# EAGLE board telemetry-r2 (EAGLE 7.7.0)
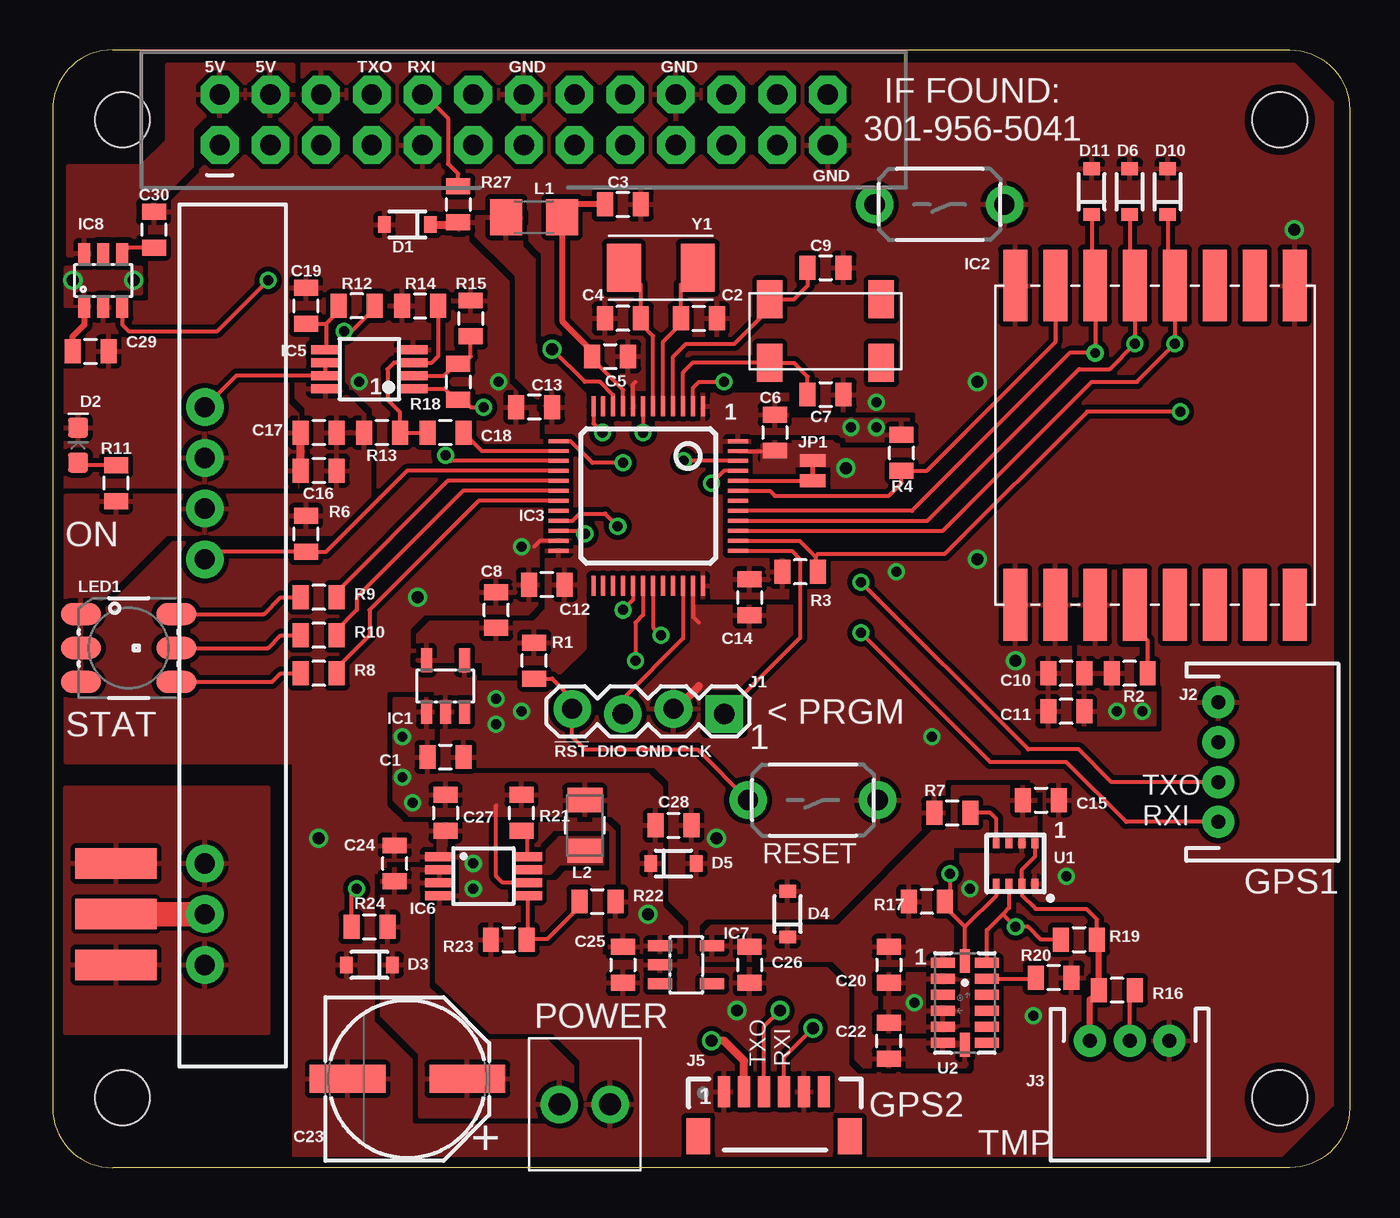
[diagram p0: board, top side]
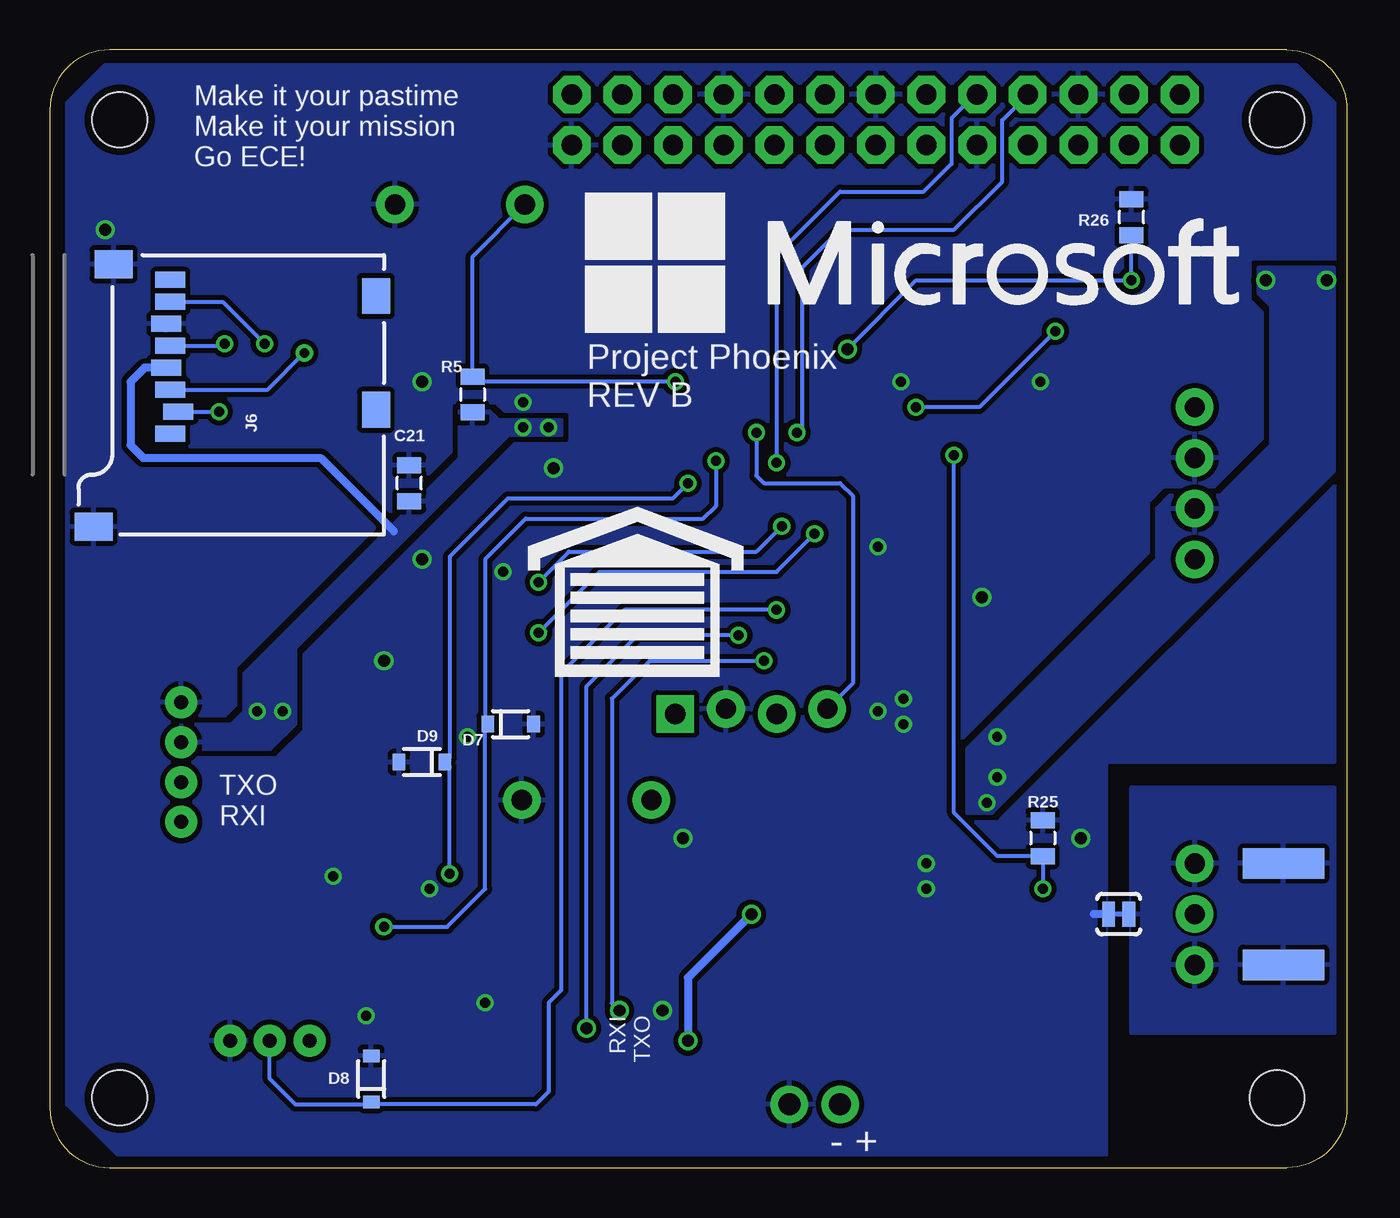
[diagram p1: board, bottom side, seen from below]

Size 65 x 56 mm. Coordinates in mm from the lower left corner, seen from the top.
Outline: 0,53 0,3 arc90 3,0 62,0 arc90 65,3 65,53 arc90 62,56 3,56 arc90 0,53
Copper layers (1*16): Top 0.0356mm / dielectric 1.5011mm / Bottom 0.0356mm
Design rules "LaenPCBOrder *": minimum track width 6mil, minimum drill 13mil, track to track 6mil, track to pad 6mil, pad to pad 6mil, via to via 6mil, smd to smd 6mil, copper to edge 15mil, drill to drill 6mil, minimum pad ring 7mil, minimum via ring 7mil, stop-mask expansion 2.5mil, vias tented up to drill 0mil, thermal gap 10mil
Holes 2.75 mm at 3.5,52.5 61.5,3.5 3.5,3.5 61.5,52.5
tKeepout: area 0.5,49.5 to 6.5,55.5; area 0.5,0.5 to 6.5,6.5; area 58.5,0.5 to 64.5,6.5; area 58.5,49.5 to 64.5,55.5

## Footprints (pad centres in the part's own frame; a part is rotated, then mirrored left to right if it is on the bottom)
0805 = smd 0.8 x 1.2: 1 -0.9,0; 2 0.9,0
PANASONIC_E = smd 3.8 x 1.4: + 3,0; - -3,0
SOD-323 = smd 0.63 x 0.83: A 1.15,0; C -1.15,0
LED-0603 = smd 1 x 1: A -0.877,0; C 0.877,0
SOT23-DBV = smd 0.55 x 1.2: 1 -0.95,-1.3; 2 0,-1.3; 3 0.95,-1.3; 4 0.95,1.3; 5 -0.95,1.3
RA02 = smd 3.6 x 1.2: 1 -8,7; 2 -8,5; 3 -8,3; 4 -8,1; 5 -8,-1; 6 -8,-3; 7 -8,-5; 8 -8,-7; 9 8,-7; 10 8,-5; 11 8,-3; 12 8,-1; 13 8,1; 14 8,3; 15 8,5; 16 8,7
TQFP48 = smd 0.2 x 1: 1 -2.75,-4.5; 2 -2.25,-4.5; 3 -1.75,-4.5; 4 -1.25,-4.5; 5 -0.75,-4.5; 6 -0.25,-4.5; 7 0.25,-4.5; 8 0.75,-4.5; 9 1.25,-4.5; 10 1.75,-4.5; 11 2.25,-4.5; 12 2.75,-4.5; 25 2.75,4.5; 26 2.25,4.5; 27 1.75,4.5; 28 1.25,4.5; 29 0.75,4.5; 30 0.25,4.5; 31 -0.25,4.5; 32 -0.75,4.5; 33 -1.25,4.5; 34 -1.75,4.5; 35 -2.25,4.5; 36 -2.75,4.5 | smd 1 x 0.2: 13 4.5,-2.75; 14 4.5,-2.25; 15 4.5,-1.75; 16 4.5,-1.25; 17 4.5,-0.75; 18 4.5,-0.25; 19 4.5,0.25; 20 4.5,0.75; 21 4.5,1.25; 22 4.5,1.75; 23 4.5,2.25; 24 4.5,2.75; 37 -4.5,2.75; 38 -4.5,2.25; 39 -4.5,1.75; 40 -4.5,1.25; 41 -4.5,0.75; 42 -4.5,0.25; 43 -4.5,-0.25; 44 -4.5,-0.75; 45 -4.5,-1.25; 46 -4.5,-1.75; 47 -4.5,-2.25; 48 -4.5,-2.75
HX1 = drill 1.016 pad 1.88: 1 0,0; 2 2.54,0; 3 5.08,0; 4 20.32,0; 5 22.86,0; 6 25.4,0; 7 27.94,0
VSSOP8 = smd 1.45 x 0.45: 1 -2.2,0.975; 2 -2.2,0.325; 3 -2.2,-0.325; 4 -2.2,-0.975; 5 2.2,-0.975; 6 2.2,-0.325; 7 2.2,0.325; 8 2.2,0.975
MSOP8 = smd 0.45 x 1.45: 1 -0.975,-2.2; 2 -0.325,-2.2; 3 0.325,-2.2; 4 0.975,-2.2; 5 0.975,2.2; 6 0.325,2.2; 7 -0.325,2.2; 8 -0.975,2.2
SOT23-6L = smd 0.6 x 1.05: 1 -0.95,-1.35; 2 0,-1.35; 3 0.95,-1.35; 4 0.95,1.35; 5 0,1.35; 6 -0.95,1.35
1X04_LOCK@1 = drill 1.016 pad 1.88 square: 1 0,0.127 | drill 1.016 pad 1.88: 2 2.54,-0.127; 3 5.08,0.127; 4 7.62,-0.127
JST-4-PTH = drill 0.7 pad 1.6: 1 -3,0; 2 -1,0; 3 1,0; 4 3,0
JST-3-PTH = drill 0.7 pad 1.6: 1 -2,0; 2 0,0; 3 2,0
1X02_SCREW = drill 1.1 pad 1.88: 1 0,0; 2 2.54,0
1X06-1MM = smd 0.6 x 1.55: 1 -2.54,1.27; 2 -1.54,1.27; 3 -0.54,1.27; 4 0.46,1.27; 5 1.46,1.27; 6 2.46,1.27 | smd 1.2 x 1.8: P$1 -3.84,-0.955; P$2 3.76,-0.955
MICRO-SD-SOCKET = smd 1.8 x 1.4: CD1 -2.05,0.4; CD2 -7.75,0.4 | smd 0.8 x 1.5: CS -7.84,10.3; DI -6.74,10.7; DO -2.34,10.7; GND -3.44,10.9; RSV1 -8.94,10.7; RSV2 -1.24,10.7; SCLK -4.54,10.7; VCC -5.64,10.9 | smd 1.4 x 1.9: GND1 -13.6,14.55; GND3 -0.45,13.55
2X13-PI = drill 1.016 pad 1.88 octagon: 1 -1.27,15.24; 2 1.27,15.24; 3 -1.27,12.7; 4 1.27,12.7; 5 -1.27,10.16; 6 1.27,10.16; 7 -1.27,7.62; 8 1.27,7.62; 9 -1.27,5.08; 10 1.27,5.08; 11 -1.27,2.54; 12 1.27,2.54; 13 -1.27,0; 14 1.27,0; 15 -1.27,-2.54; 16 1.27,-2.54; 17 -1.27,-5.08; 18 1.27,-5.08; 19 -1.27,-7.62; 20 1.27,-7.62; 21 -1.27,-10.16; 22 1.27,-10.16; 23 -1.27,-12.7; 24 1.27,-12.7; 25 -1.27,-15.24; 26 1.27,-15.24
SMA-EDGE = smd 1.524 x 4.064: GND@0 0,0; GND@1 5.08,0; SIG 2.54,0 | smd 1.524 x 4.064 bottom: GND@2 0,0; GND@3 5.08,0
SMT-JUMPER_2_NC_TRACE_NO-SILK = smd 0.635 x 1.27: 1 -0.508,0; 2 0.508,0
PAD-JUMPER-2-NC_BY_TRACE_YES_SILK = smd 0.635 x 1.27: 1 -0.508,0; 2 0.508,0
1206 = smd 1.6 x 1.8: 1 -1.4,0; 2 1.4,0
1008 = smd 1.753 x 1.219: 1 0,1.27; 2 0,-1.27
LED-TRICOLOR-5050 = smd 2 x 1.1: 1 -2.4,1.7; 2 -2.4,0; 3 -2.4,-1.7; 4 2.4,-1.7; 5 2.4,0; 6 2.4,1.7
TACTILE-PTH-THIN = drill 1.016 pad 1.88: 1 -3.251,0; 2 3.251,0
BME280_LGA = smd 0.5 x 0.35: P$1 1.025,0.975; P$2 1.025,0.325; P$3 1.025,-0.325; P$4 1.025,-0.975; P$5 -1.025,-0.975; P$6 -1.025,-0.325; P$7 -1.025,0.325; P$8 -1.025,0.975
LGA14 = smd 0.5 x 1.2: 1 2,1.1; 2 1.2,1.1; 3 0.4,1.1; 4 -0.4,1.1; 5 -1.2,1.1; 6 -2,1.1; 8 -2,-1.1; 9 -1.2,-1.1; 10 -0.4,-1.1; 11 0.4,-1.1; 12 1.2,-1.1; 13 2,-1.1 | smd 1.2 x 0.5: 7 -2.1,0; 14 2.1,0
CRYSTAL-TXC-7A = smd 1.7 x 2.4: P$1 1.85,0; P$2 -1.85,0
ABS25 = smd 1.27 x 1.905: 1 -2.794,-1.587; 2 2.794,-1.587; 3 2.794,1.587; 4 -2.794,1.587

## Placement (x,y rotation side)
C1  0.1u  [0805]  19.68,20.57 0 top
C2  33p  [0805]  32.38,42.55 0 top
C3  1u  [0805]  28.57,48.26 0 top
C4  33p  [0805]  28.57,42.55 180 top
C5  0.1u  [0805]  27.94,40.64 0 top
C6  0.1u  [0805]  36.2,36.83 270 top
C7  10p  [0805]  38.73,38.73 0 top
C8  1u  [0805]  22.23,27.94 90 top
C9  10p  [0805]  38.73,45.09 0 top
C10  0.1u  [0805]  50.8,24.77 180 top
C11  10u  [0805]  50.8,22.86 180 top
C12  0.1u  [0805]  24.77,29.21 180 top
C13  0.1u  [0805]  24.13,38.1 180 top
C14  0.1u  [0805]  34.92,28.57 270 top
C15  0.1u  [0805]  49.53,18.41 0 top
C16  1u  [0805]  13.34,34.92 180 top
C17  0.1u  [0805]  13.34,36.83 180 top
C18  330p  [0805]  19.68,36.83 180 top
C19  100p  [0805]  12.7,43.18 90 top
C20  1.0u  [0805]  41.91,10.16 270 top
C21  1u  [0805]  46.99,34.29 90 bottom
C22  0.1u  [0805]  41.91,6.35 90 top
C23  100u  [PANASONIC_E]  17.78,4.45 0 top
C24  1u  [0805]  17.14,15.24 90 top
C25  0.1u  [0805]  28.57,10.16 270 top
C26  1u  [0805]  34.92,10.16 270 top
C27  10u  [0805]  19.68,17.78 270 top
C28  10u  [0805]  31.11,17.14 0 top
C29  0.1u  [0805]  1.91,40.89 0 top
C30  1n  [0805]  5.08,46.99 90 top
D1  5.6V  [SOD-323]  17.78,47.24 180 top
D2  GREEN  [LED-0603]  1.27,36.2 90 top
D3  15V  [SOD-323]  15.88,10.16 180 top
D4  5.6V  [SOD-323]  36.83,12.7 90 top
D5  5.6V  [SOD-323]  31.11,15.24 0 top
D6  5.6V  [SOD-323]  53.98,48.9 90 top
D7  5.6V  [SOD-323]  41.91,22.23 0 bottom
D8  5.6V  [SOD-323]  48.9,4.45 90 bottom
D9  5.6V  [SOD-323]  46.35,20.32 180 bottom
D10  5.6V  [SOD-323]  55.88,48.9 90 top
D11  5.6V  [SOD-323]  52.07,48.9 90 top
FRAME1  FRAME-LETTERNO_PACKAGE  [DUMMY]  0,57.15 0 top
FRAME2  FRAME-LETTERNO_PACKAGE  [DUMMY]  1.27,57.15 0 top
IC1  TPS70933  [SOT23-DBV]  19.68,24.13 0 top
IC2  RA02  [RA02]  55.24,36.2 90 top
IC3  STM32L052C8T6  [TQFP48]  29.84,33.66 180 top
IC4  HX1  [HX1]  7.62,10.16 90 top
IC5  LMP7702  [VSSOP8]  15.88,40.01 180 top
IC6  TPS62160  [MSOP8]  21.59,14.61 270 top
IC7  TPS70933  [SOT23-DBV]  31.75,10.16 270 top
IC8  TPS22918  [SOT23-6L]  2.54,44.45 0 top
J1  DNP  [1X04_LOCK@1]  33.66,22.86 180 top
J2  GPS1  [JST-4-PTH]  58.42,20.32 270 top
J3  TEMP  [JST-3-PTH]  53.98,6.35 180 top
J4  POWER  [1X02_SCREW]  25.4,3.17 0 top
J5  GPS2  [1X06-1MM]  36.2,2.54 0 top
J6  MICRO-SD_CARD_SOCKET  [MICRO-SD-SOCKET]  48.26,45.72 90 bottom
J7  RASPBERRYPI-GPIO  [2X13-PI]  23.61,52.5 90 top
J$1  SMA_EDGE  [SMA-EDGE]  3.17,10.16 90 top
JP1  [SMT-JUMPER_2_NC_TRACE_NO-SILK]  38.1,34.92 90 top
JP2  GND  [PAD-JUMPER-2-NC_BY_TRACE_YES_SILK]  11.43,12.7 180 bottom
L1  FERRITE  [1206]  24.13,47.62 0 top
L2  2.2u  [1008]  26.67,17.14 180 top
LED1  COM-10866  [LED-TRICOLOR-5050]  3.81,26.04 0 top
R1  10K  [0805]  24.13,25.4 90 top
R2  10K  [0805]  53.98,24.77 180 top
R3  10K  [0805]  37.47,29.84 180 top
R4  10K  [0805]  42.55,35.81 90 top
R5  10K  [0805]  43.81,38.73 270 bottom
R6  4.7K  [0805]  12.7,31.75 90 top
R7  10K  [0805]  45.09,17.78 0 top
R8  470  [0805]  13.34,24.77 180 top
R9  470  [0805]  13.34,28.57 180 top
R10  560  [0805]  13.34,26.67 180 top
R11  3.3K  [0805]  3.17,34.29 90 top
R12  330K  [0805]  15.24,43.18 180 top
R13  820K  [0805]  16.51,36.83 180 top
R14  220K  [0805]  18.41,43.18 0 top
R15  430K  [0805]  20.95,42.55 270 top
R16  4.7K  [0805]  53.34,8.89 180 top
R17  3.3K  [0805]  43.81,13.34 180 top
R18  680K  [0805]  20.32,39.37 270 top
R19  3.3K  [0805]  51.44,11.43 0 top
R20  10K  [0805]  50.16,9.53 180 top
R21  10K  [0805]  23.5,17.78 90 top
R22  430K  [0805]  27.3,13.34 0 top
R23  82K  [0805]  22.86,11.43 0 top
R24  430K  [0805]  15.88,12.06 0 top
R25  100K  [0805]  15.24,16.51 270 bottom
R26  10K  [0805]  10.79,47.62 90 bottom
R27  10K  [0805]  20.32,48.26 270 top
S1  RST  [TACTILE-PTH-THIN]  38.1,18.41 180 top
S2  BTN  [TACTILE-PTH-THIN]  44.45,48.26 180 top
U1  BME280  [BME280_LGA]  48.26,15.24 270 top
U2  ADXL345  [LGA14]  45.72,8.26 90 top
U$1  [GARAGE]  35.56,27.94 0 bottom
U$2  [MSFT_LOGO]  19.05,45.09 0 bottom
Y1  8M  [CRYSTAL-TXC-7A]  30.48,45.09 0 top
Y2  32768  [ABS25]  38.73,41.91 0 top

## Library data of the parts
C1-C30 JP2 R1-R27 = SparkFun-Passives
D1 D3-D11 = SparkFun-DiscreteSemi; PROD_ID: DIO-12442
D2 = SparkFun-LED; PROD_ID: DIO-00821
FRAME1 FRAME2 = SparkFun-Aesthetics; DESIGNER: Nobody; VERSION: v01
IC1 IC7 = texas; MF: TEXAS INSTRUMENTS; MPN: TPS77033DBVT; OC_FARNELL: 8461570; OC_NEWARK: 77C1187
IC2 IC4-IC6 IC8 J4 J7 L1 L2 S1 S2 U$1 U$2 Y2 = HAB
IC3 = stm32xx
J1 = SparkFun-Connectors; PROD_ID: CONN-09696
J2 = SparkFun-Connectors; PROD_ID: WIRE-13531; SF_ID: PRT-09916
J3 = SparkFun-Connectors; PROD_ID: WIRE-10037; SF_ID: PRT-09915
J5 J$1 = SparkFun-Connectors
J6 = SparkFun-Connectors; PROD_ID: CONN-07820; SF_ID: PRT-00127
JP1 = SparkFun-Jumpers
LED1 = SparkFun-LED
U1 = BME280ComponentLibrary; PROD_ID: IC-13090
U2 = SparkFun-Sensors
Y1 = SparkFun-FreqCtrl

## Nets
3.3V: C6.1 C8.1 C10.1 C11.1 C12.1 C13.1 C14.1 C21.1 D1.C IC1.5 IC2.3 IC3.1 IC3.24 IC3.36 IC3.48 J2.2 J6.VCC L1.1 R1.2 R2.2 R3.2 R4.2 R5.2 R27.2
3V_PI: J7.1
3V_PI2: J7.17
5V: C1.1 C16.1 C17.1 C25.1 C27.1 C28.1 C29.1 D5.C IC1.1 IC4.5 IC5.8 IC6.6 IC7.1 IC8.1 J5.2 L2.2 LED1.1 LED1.2 LED1.3 R6.2 R11.1 R13.2 R21.2 R22.2
5V_PI: IC8.6 J7.2 J7.4
!LORA_IRQ!: IC2.5
!LORA_RST!: IC2.4 R2.1
!RST!: IC3.7 J1.4 R1.1 S1.2
A+: C18.2 IC5.3 R13.1 R14.2
A-: IC5.2 R15.2 R18.1
ADXL_SDO: R20.2 U2.12
BC: LED1.4 R8.2
BME_SDO: R7.2 U1.P$5
BOOT0: IC3.44 JP1.1
BTN: IC3.2 R5.1 S2.2
CT: C30.1 IC8.4
DAC: C18.1 IC3.14
FB5: IC6.5 R22.1 R23.2
GC: LED1.6 R9.2
GND: C1.2 C2.2 C3.2 C4.2 C5.2 C6.2 C7.2 C8.2 C9.2 C10.2 C11.2 C12.2 C13.2 C14.2 C15.2 C16.2 C17.2 C19.2 C20.2 C21.2 C22.2 C23.- C24.2 C25.2 C26.2 C27.2 C28.2 C29.2 C30.2 D1.A D2.C D3.A D4.A D5.A D6.A D7.A D8.A D9.A D10.A D11.A IC1.2 IC1.4 IC2.1 IC2.2 IC2.9 IC2.16 IC3.8 IC3.23 IC3.35 IC3.47 IC4.6 IC5.4 IC6.1 IC6.4 IC7.2 IC8.2 J1.2 J2.1 J3.1 J4.2 J5.1 J5.5 J6.GND J6.GND1 J6.GND3 J7.6 J7.9 J7.14 J7.20 J7.25 JP1.2 JP2.2 R7.1 R14.1 R15.1 R20.1 R23.1 R25.1 R26.2 S1.1 S2.1 U1.P$1 U1.P$7 U2.2 U2.4 U2.5
GPSRX1: IC3.22 J2.4
GPSRX2: IC3.31 J5.4
GPSTX1: IC3.21 J2.3
GPSTX2: IC3.30 J5.3
HXEN: IC3.16 IC4.4 R6.1
INT: U2.8
INT2: U2.9
K_PI: IC3.10 IC8.3 R26.1
LCS: IC2.15 IC3.43 R4.1
LEDB: IC3.19 R8.1
LEDG: IC3.17 R9.1
LEDR: IC3.18 R10.1
LP1: IC5.1 R12.1 R18.2
LP2: C19.1 IC5.5 R12.2
MISO: D6.C IC2.13 IC3.40 J6.DO
MOSI: D11.C IC2.14 IC3.41 J6.DI
OSC32_IN: C7.1 IC3.3 Y2.1
OSC32_OUT: C9.1 IC3.4 Y2.4
OSC_IN: C2.1 IC3.5 Y1.P$1
OSC_OUT: C4.1 IC3.6 Y1.P$2
PG5: IC6.8 R21.1
PLED: D2.A R11.2
R_CS0: J7.24
R_CS1: J7.26
R_MISO: J7.21
R_MOSI: J7.19
R_RX: IC3.13 J7.10 R27.1
R_SCK: J7.23
R_TX: IC3.12 J7.8
RC: LED1.5 R10.2
RF_HX1: IC4.2 J$1.SIG
RGND: IC4.1 IC4.3 J$1.GND@0 J$1.GND@1 J$1.GND@2 J$1.GND@3 JP2.1
SCK: D10.C IC2.12 IC3.39 J6.SCLK
SCL: D9.C IC3.45 R17.1 U1.P$4 U2.14
SDA: D7.C IC3.46 R19.1 U1.P$3 U2.13
SDCS: IC3.38 J6.CS R3.1
SW5: IC6.7 L2.1
SWCLK: IC3.37 J1.1
SWDIO: IC3.34 J1.3
TEMP: D8.C IC3.29 J3.2 R16.1
TXD: IC4.7 IC5.6 IC5.7
U_RX: IC3.42
VBAT: C23.+ C24.1 D3.C IC6.2 IC6.3 J4.1 R24.2
VDDA: C3.1 C5.1 IC3.9 L1.2
VDIV: IC3.15 R24.1 R25.2
VS: C15.1 C20.1 C22.1 C26.1 D4.C IC7.5 J3.3 R16.2 R17.2 R19.2 U1.P$2 U1.P$6 U1.P$8 U2.1 U2.6 U2.7

## Tracks (layer width: path | path; a pad name or v marks a point on that pad's centre or on a via)
3.3V  (via drill 0.5)
  Top 0.406: D1.C 20.2,47.24 R27.2
  Bottom 0.406: J6.VCC 60.25,40.08 60.96,39.37 60.96,36.2 60.33,35.56 51.44,35.56 47.75,31.88
  other vias: 53.34,22.86 54.61,22.86 41.27,37.08 40.01,37.08
  pour Top (isolate 0.254, rank 3): 20.32,47.62 20.32,46.99 20.95,46.99 23.24,44.7 23.24,39.62 24.77,38.1 24.77,27.94 24.13,27.3 18.92,27.3 18.29,26.67 18.29,25.4 21.59,25.4 21.59,24.77 25.4,24.77 26.67,26.04 26.67,28.57 36.83,28.57 36.83,30.48 34.92,30.48 34.92,36.83 39.37,36.83 39.75,36.45 42.93,36.45 42.93,37.47 36.83,37.47 36.83,38.73 26.67,38.73 24.13,41.27 24.13,45.47 23.5,46.1 23.5,47.62
  pour Top (isolate 0.305, rank 2): 51.44,29.84 51.44,22.23 55.24,22.23 55.24,26.04 53.34,26.04 53.34,29.84
  pour Bottom (isolate 0.254, rank 2): 39.37,37.47 39.37,36.7 42.04,36.7 52.7,26.04 52.7,22.23 53.98,20.95 58.42,20.95 58.42,22.23 55.88,22.23 55.24,22.86 55.24,24.77 44.45,35.56 44.45,38.1 43.18,38.1 42.55,37.47
5V  (via drill 0.5, 0.6)
  Top 0.203: IC6.6 22.55,14.28 22.23,14.61 22.23,18.15
  Top 0.305: IC8.1 1.59,42.23 1,41.65 C29.1
  Top 0.406: J5.2 34.66,5.35 33.66,6.35 v33.02,6.35
  Bottom 0.406: v29.84,12.7 33.02,9.53 v33.02,6.35
  other vias: 17.53,19.56 4.06,44.45 1.02,44.45 17.53,21.59 18.03,18.29
  pour Top (isolate 0.254, rank 2): 28.57,13.34 28.57,17.14 28.07,17.65 17.91,17.65 17.14,18.41 17.14,23.5 19.05,23.5 19.05,19.68 29.84,19.68 30.48,19.05 30.48,13.08 31.5,12.06 31.5,10.79 27.94,10.79 27.94,13.34
  pour Top (isolate 0.254, rank 3): 0.64,24.13 1.91,24.13 1.91,27.94 5.71,31.75 13.97,31.75 15.88,33.66 15.88,37.47 13.97,39.37 12.19,39.37 12.19,38.61 12.7,38.1 12.7,33.66 0.64,33.66
  pour Top (isolate 0.305, rank 3): 0.64,45.09 0.64,43.18 1.91,43.18 2.54,43.81 4.45,43.81 4.45,45.09
  pour Bottom (isolate 0.254, rank 3): 19.05,20.95 19.05,17.78 17.78,17.78 0.64,34.92 0.64,45.09 4.45,45.09 4.45,43.81 3.81,43.18 3.81,36.2 6.35,33.66 8.89,33.66 9.53,33.02 9.53,30.48
5V_PI
  pour Top (isolate 0.305, rank 2): 5.71,55.24 5.71,51.44 4.45,50.16 0.76,50.16 0.76,45.72 4.45,45.72 4.45,47.62 6.99,50.16 6.99,52.07 7.62,52.7 12.06,52.7 12.06,55.24
!LORA_RST!
  Top 0.203: R2.1 54.88,26.41 54.24,27.04 IC2.4
!RST!  (via drill 0.5)
  Top 0.203: R1.1 25.03,24.5 26.04,23.5 J1.4 26.04,21.59 26.67,20.95 32.31,20.95 S1.2 | IC3.7 v29.59,36.83
  Bottom 0.203: J1.4 24.77,24.26 24.77,33.66 25.4,34.29 29.21,34.29 29.59,34.67 v29.59,36.83
A+
  Top 0.203: C18.2 R13.1 17.41,37.84 16.77,38.47 16.77,40.01 17.1,40.33 IC5.3 18.99,40.33 19.32,40.65 R14.2
A-
  Top 0.203: R15.2 20.95,40.64 20.59,40.27 R18.1 20.2,40.27 19.61,39.68 IC5.2
ADXL_SDO
  Top 0.203: U2.12 49.2,9.46 R20.2
BC
  Top 0.203: LED1.4 11,24.34 11.43,24.77 R8.2
BME_SDO
  Top 0.203: U1.P$5 47.28,17.48 46.99,17.78 R7.2
BOOT0
  Top 0.203: IC3.44 38.09,34.41 JP1.1
BTN  (via drill 0.5)
  Top 0.203: IC3.2 32.09,39.08 32.38,39.37 v33.66,39.37
  Bottom 0.203: v33.66,39.37 43.55,39.37 R5.1 43.81,45.64 S2.2
CT
  Top 0.203: C30.1 3.78,46.09 IC8.4
DAC
  Top 0.203: IC3.14 21.51,35.91 C18.1
FB5
  Top 0.203: R22.1 26.41,13.07 24.8,11.46 23.79,11.46 | IC6.5 23.79,11.46 | 23.79,11.46 R23.2
GC
  Top 0.203: LED1.6 10.59,27.73 11.43,28.57 R9.2
GND  (via drill 0.5, 0.6)
  Top 0.203: IC3.47 36.17,35.91 C6.2 | IC3.8 29.09,39.26 29.21,39.37 | IC3.23 24.42,31.41 24.13,31.11 | IC3.35 32.09,27.59 32.38,27.3
  Top 0.406: C16.2 C17.2 | J1.2 31.11,22.86 32.38,24.13
  Bottom 0.406: JP2.2 12.7,12.7
  other vias: 13.34,16.51 22.35,39.37 34.29,7.87 33.27,16.51 43.18,8.26 41.27,38.35 50.8,14.61 22.23,23.5 23.5,31.11 45.97,13.97 48.26,25.4 21.08,15.24 21.08,13.97 18.29,28.57 42.29,29.84 46.35,30.48 49.15,7.62 62.23,46.99 39.75,35.05 44.07,21.59 46.35,39.37 22.23,22.23 15.37,39.37 23.5,22.86
  pour Top (isolate 0.254, rank 4): 7.62,55.24 7.62,50.16 5.71,48.26 0.64,48.26 0.64,20.32 12.06,20.32 12.06,0.64 61.59,0.64 64.14,3.17 64.14,53.34 62.23,55.24
  pour Bottom (isolate 0.254, rank 4): 2.54,55.24 0.64,53.34 0.64,20.32 12.06,20.32 12.06,0.64 61.59,0.64 64.14,3.17 64.14,53.34 62.23,55.24
  pour Top (isolate 0.203, rank 3, no thermals): 19.3,17.14 19.3,15.62 19.68,15.62 19.68,17.14
  pour Top (rank 2, no thermals): 35.56,36.2 35.56,35.18 39.37,35.18 39.37,36.2
GPSRX1  (via drill 0.5)
  Top 0.203: IC3.22 26.52,31.91 v26.67,31.75 | J2.4 53.8,17.32 50.8,20.32 46.99,20.32 v40.51,26.8
  Bottom 0.203: v40.51,26.8 37.47,29.84 28.57,29.84 v26.67,31.75
GPSRX2  (via drill 0.5, 0.6)
  Top 0.203: J5.4 36.66,5.54 v38.1,6.99 | IC3.31 30.09,27.05 v30.48,26.67
  Bottom 0.203: v38.1,6.99 38.1,24.13 35.56,26.67 v30.48,26.67
GPSTX1  (via drill 0.5)
  Top 0.203: IC3.21 26.05,32.41 26.42,32.77 27.69,32.77 v28.32,32.13 | J2.3 53.07,19.32 51.44,20.95 48.9,20.95 v40.51,29.34
  Bottom 0.203: v40.51,29.34 38.99,30.86 29.59,30.86 v28.32,32.13
GPSTX2  (via drill 0.5, 0.6)
  Top 0.203: J5.3 35.66,7.08 v36.45,7.87 | IC3.30 29.59,27.69 29.21,27.3 v29.21,25.4
  Bottom 0.203: v29.21,25.4 34.92,25.4 36.83,23.5 36.83,8.26 v36.45,7.87
HXEN
  Top 0.203: IC3.16 17.76,34.91 13.71,30.85 R6.1 7.99,30.85 IC4.4
K_PI  (via drill 0.5, 0.6)
  Top 0.203: IC3.10 28.09,38.71 27.43,39.37 26.67,39.37 v25.03,41.01 | IC8.3 3.49,42.23 3.81,41.91 8.26,41.91 v10.79,44.45
  Bottom 0.203: v25.03,41.01 21.59,44.45 v10.79,44.45 R26.1
LCS
  Top 0.203: IC3.43 35.95,33.91 36.2,33.66 41.91,33.66 42.55,34.29 R4.1 43.8,34.91 50.24,41.35 IC2.15
LEDB
  Top 0.203: R8.1 14.23,25.03 15.88,26.67 15.88,27.94 21.34,33.41 IC3.19
LEDG
  Top 0.203: R9.1 14.23,28.84 19.8,34.41 IC3.17
LEDR
  Top 0.203: R10.1 14.23,26.93 15.24,27.94 15.24,28.57 20.57,33.91 IC3.18
LP1  (via drill 0.5)
  Top 0.203: v21.59,38.1 20.95,38.1 20.59,38.47 R18.2 20.2,38.47 19.64,39.03 IC5.1 | R12.1 16.14,43.06 14.99,41.91 v14.61,41.91
  Bottom 0.203: v14.61,41.91 18.41,38.1 v21.59,38.1
LP2
  Top 0.203: C19.1 13.71,42.28 | R12.2 14.34,42.91 13.71,42.28 | 13.71,42.28 13.71,41.01 IC5.5
MISO  (via drill 0.5)
  Top 0.203: IC3.40 43.84,32.41 51.44,40.01 52.98,40.01 v54.24,41.27 IC2.13 53.98,44.47 D6.C
  Bottom 0.203: J6.DO 56.35,43.38 v54.24,41.27
MOSI  (via drill 0.5)
  Top 0.203: D11.C 52.07,44.37 IC2.14 v52.24,40.81 50.98,40.81 43.06,32.91 IC3.41
  Bottom 0.203: J6.DI 54.08,38.98 v52.24,40.81
OSC32_IN
  Top 0.203: IC3.3 31.59,39.85 32.07,40.32 Y2.1 37.15,40.32 37.84,39.63 C7.1
OSC32_OUT
  Top 0.203: IC3.4 31.09,40.62 31.75,41.27 34.16,41.27 35.94,43.05 Y2.4 37.15,43.5 37.84,44.19 C9.1
OSC_IN
  Top 0.203: IC3.5 30.59,41.39 31.48,42.28 C2.1 31.48,44.24 Y1.P$1
OSC_OUT
  Top 0.203: IC3.6 30.09,41.66 29.48,42.28 C4.1 29.48,44.24 Y1.P$2
PG5
  Top 0.203: IC6.8 23.79,16.59 R21.1
PLED
  Top 0.203: R11.2 1.4,35.19 D2.A
R_RX  (via drill 0.5)
  Top 0.203: R27.1 20.32,49.78 19.81,50.29 19.81,52.58 18.62,53.77 J7.10 | IC3.13 25.95,36.41 27.05,35.31 v28.57,35.31
  Bottom 0.203: J7.10 18.62,53.77 19.81,52.58 19.81,50.29 21.21,48.9 25.4,48.9 28.57,45.72 v28.57,35.31
R_TX  (via drill 0.5)
  Top 0.203: IC3.12 27.09,37.29 v27.56,36.83
  Bottom 0.203: J7.8 17.27,52.49 17.27,49.4 19.68,46.99 25.4,46.99 27.3,45.09 27.3,37.08 v27.56,36.83
RC
  Top 0.203: LED1.5 10.79,26.04 11.43,26.67 R10.2
RF_HX1
  Top 1.232: J$1.SIG IC4.2
RGND
  pour Top (isolate 0.203, rank 3): 0.64,6.73 0.64,19.05 10.79,19.05 10.79,6.73
  pour Bottom (rank 3): 0.64,19.05 0.64,6.73 10.79,6.73 10.79,19.05
SCK  (via drill 0.5)
  Top 0.203: IC3.39 44.6,31.91 52.07,39.37 54.34,39.37 v56.24,41.27 IC2.12 55.88,44.56 D10.C
  Bottom 0.203: J6.SCLK 56.34,41.18 v56.24,41.27
SCL  (via drill 0.5)
  Top 0.203: U1.P$4 47.28,13.63 45.72,12.06 | U2.14 45.72,12.06 | IC3.45 33.63,34.91 v33.02,34.29 | 45.72,12.06 44.97,12.82 44.97,13.09 R17.1 44.97,13.59 v44.97,14.73
  Bottom 0.203: v33.02,34.29 33.78,33.53 42.04,33.53 44.97,30.6 44.97,20.56 D9.C 44.97,20.08 v44.97,14.73
SDA  (via drill 0.5)
  Top 0.203: U1.P$3 47.94,13.01 47.62,12.7 | 47.62,12.7 46.82,11.89 U2.13 | IC3.46 v31.62,35.41 | 47.62,12.7 v48.26,12.06 48.9,12.06 49.53,11.43 R19.1
  Bottom 0.203: v48.26,12.06 45.09,12.06 43.18,13.97 43.18,22.11 D7.C 43.18,22.34 43.18,30.48 41.15,32.51 32.26,32.51 31.62,33.15 v31.62,35.41
SDCS  (via drill 0.5)
  Top 0.203: IC3.38 37.44,31.41 38.23,30.61 | 38.23,30.61 38.37,30.75 44.72,30.75 51.85,37.88 v56.52,37.88 | 38.23,30.61 38.23,29.98 R3.1
  Bottom 0.203: J6.CS v56.52,37.88
SW5
  pour Top (isolate 0.203, rank 3, no thermals): 23.5,15.24 23.5,14.78 24.94,14.78 25.4,15.24 27.56,15.24 27.56,16.51 25.4,16.51 24.13,15.24
SWCLK
  Top 0.203: IC3.37 37.04,30.91 37.47,30.48 37.47,26.54 J1.1
SWDIO
  Top 0.203: IC3.34 31.59,26.52 28.57,23.5 J1.3
TEMP  (via drill 0.5)
  Top 0.203: J3.2 53.98,8.62 R16.1 53.98,9.15 | IC3.29 29.09,28.46 v28.57,27.94
  Bottom 0.203: v28.57,27.94 36.2,27.94 39.37,24.77 39.37,8.89 40.01,8.26 40.01,3.81 40.64,3.17 48.77,3.17 D8.C 49.02,3.17 52.7,3.17 53.98,4.45 J3.2
TXD
  Top 0.203: IC5.6 IC5.7 9.2,39.68 IC4.7
VBAT
  pour Top (isolate 0.254, rank 3): 18.41,2.54 18.41,5.71 16.51,7.62 16.51,14.99 19.68,14.99 19.68,13.97 18.8,13.97 18.8,9.02 20.95,6.99 21.59,6.35 24.77,6.35 26.04,5.08 26.04,2.54
VDDA
  Top 0.203: IC3.9 28.59,38.97 27.04,40.52 C5.1 27.04,40.91
  Top 0.305: C3.1 26.16,48.26 L1.2 25.53,42.41 27.04,40.91
VDIV  (via drill 0.5)
  Top 0.203: R24.1 14.97,13.71 v15.24,13.97 | IC3.15 19.97,35.41 v19.68,35.69
  Bottom 0.203: v19.68,35.69 19.68,17.78 17.52,15.61 R25.2 v15.24,13.97
VS
  Top 0.203: U1.P$8 49.23,15.58 48.59,14.93 U1.P$2 48.59,13.64 49.27,12.96 51.8,12.96 52.34,12.44 R19.2
  Top 0.305: J3.3 51.98,8.43 R16.2 52.44,11.32 R19.2
  pour Top (isolate 0.254, rank 2): 40.26,9.27 40.26,5.46 40.64,5.08 45.72,5.08 46.35,5.71 46.35,6.35 41.27,6.35 41.27,10.16 45.09,10.16 45.09,16.13 46.99,16.13 46.99,16.51 48.26,16.51 48.26,16.89 48.9,16.89 48.9,16.51 49.28,16.51 49.28,19.05 45.09,19.05 45.09,17.14 44.45,17.14 39.37,12.06 33.02,12.06 32.77,11.81 32.77,10.41 39.12,10.41

## Text on the board
tPlace: 5V | 5V | TXO | RXI | GND | GND | IF FOUND: / 301-956-5041 | GND | 1 | 1 | ON | STAT | < PRGM | !RST! DIO GND CLK | 1 | 1 | TXO / RXI | RESET | GPS1 | 1 | POWER | TXO / RXI | 1 | + | TMP
bPlace: Make it your pastime / Make it your mission / Go ECE! | Project Phoenix / REV B | TXO / RXI | RXI / TXO | + -